# Altium PCB PCB-esp32.PcbDoc (part 2 of 2)
Units mil, origin at the board's own origin, x right, y up, seen from the top; angles counter-clockwise.
Board outline 2705 x 1000 mil, 4 copper layers (L1, L2, L3, L4), stack 61.583 mil thick; 64 components, 80 nets, 299 pads, 75 vias.
Unrouted connection lines stored in the file: 6.
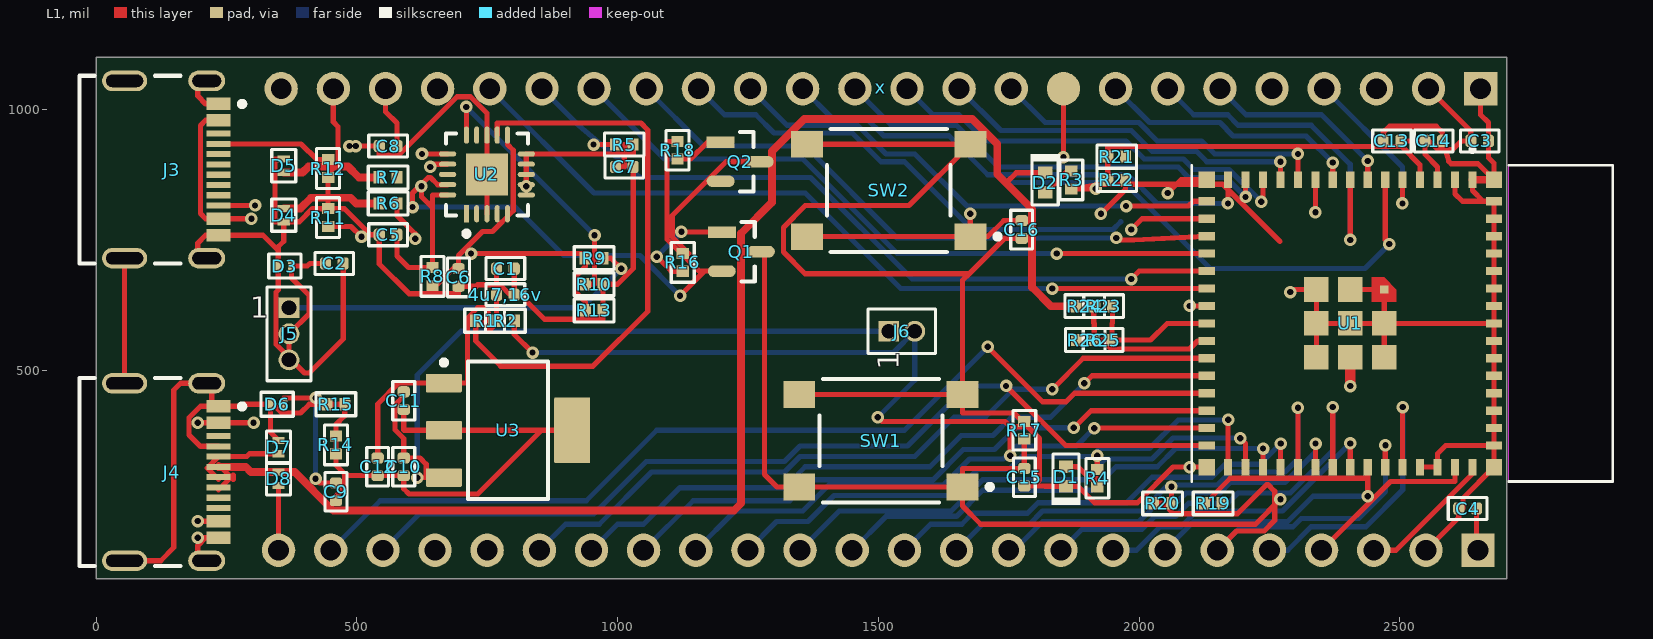
[diagram p0: L1 view]

## Part data (continued)
R6 R7 R21 R22: library part RC0402FR-0727RL, "RES 27 OHM 1% 1/16W 0402", Case Code (Imperial)=0402, Case Code (Metric)=1005, Manufacturer="Yageo Group", Max Operating Temperature=155°C, Max Power Dissipation=63mW, Min Operating Temperature=-55°C, Power Dissipation=62.5mW, Supplier Part Number=YAG3086CT-ND, Temperature Coefficient=100ppm/°C, Tolerance=1%, Voltage Rating=50V, Case/Package=0402, Category="Chip SMD Resistors", China RoHS=Non-Compliant, ComponentLink1Description=https://datasheet.octopart.com:443/RC0402FR-0727RL-Yageo-datasheet-175887523.pdf?src-supplier=Newark, ComponentLink1URL=https://datasheet.octopart.com:443/RC0402FR-0727RL-Yageo-datasheet-175887523.pdf?src-supplier=Newark, ComponentLink2Description=https://datasheet.octopart.com:443/RC0402FR-0727RL-Yageo-datasheet-8324527.pdf?src-supplier=Newark, ComponentLink2URL=https://datasheet.octopart.com:443/RC0402FR-0727RL-Yageo-datasheet-8324527.pdf?src-supplier=Newark, ComponentLink3Description=https://datasheet.octopart.com:443/RC0402FR-0727RL-Yageo-datasheet-103092701.pdf?src-supplier=Upverter, ComponentLink3URL=https://datasheet.octopart.com:443/RC0402FR-0727RL-Yageo-datasheet-103092701.pdf?src-supplier=Upverter, ComponentLink4Description=https://datasheet.octopart.com:443/RC0402FR-0727RL-Yageo-datasheet-10408619.pdf?src-supplier=element14+APAC, ComponentLink4URL=https://datasheet.octopart.com:443/RC0402FR-0727RL-Yageo-datasheet-10408619.pdf?src-supplier=element14+APAC, ComponentLink5Description=https://datasheet.octopart.com:443/RC0402FR-0727RL-Yageo-datasheet-62067350.pdf?src-supplier=element14+APAC, ComponentLink5URL=https://datasheet.octopart.com:443/RC0402FR-0727RL-Yageo-datasheet-62067350.pdf?src-supplier=element14+APAC, ComponentLink6Description=https://datasheet.octopart.com:443/RC0402FR-0727RL-Yageo-Group-datasheet-176638170.pdf?src-supplier=Future+Electronics, ComponentLink6URL=https://datasheet.octopart.com:443/RC0402FR-0727RL-Yageo-Group-datasheet-176638170.pdf?src-supplier=Future+Electronics, ComponentLink7Description=https://datasheet.octopart.com:443/RC0402FR-0727RL-Yageo-datasheet-164759695.pdf?src-supplier=Future+Electronics, ComponentLink7URL=https://datasheet.octopart.com:443/RC0402FR-0727RL-Yageo-datasheet-164759695.pdf?src-supplier=Future+Electronics, ComponentLink8Description=https://datasheet.octopart.com:443/RC0402FR-0727RL-Yageo-datasheet-137700087.pdf?src-supplier=Future+Electronics, ComponentLink8URL=https://datasheet.octopart.com:443/RC0402FR-0727RL-Yageo-datasheet-137700087.pdf?src-supplier=Future+Electronics, ComponentLink9Description=https://datasheet.octopart.com:443/RC0402FR-0727RL-Yageo-datasheet-12531192.pdf?src-supplier=Future+Electronics, ComponentLink9URL=https://datasheet.octopart.com:443/RC0402FR-0727RL-Yageo-datasheet-12531192.pdf?src-supplier=Future+Electronics, ComponentLink10Description=https://datasheet.octopart.com:443/RC0402FR-0727RL-Yageo-datasheet-175423674.pdf?src-supplier=SOS+electronic, ComponentLink10URL=https://datasheet.octopart.com:443/RC0402FR-0727RL-Yageo-datasheet-175423674.pdf?src-supplier=SOS+electronic, ComponentLink11Description=https://datasheet.octopart.com:443/RC0402FR-0727RL-Yageo-datasheet-8329306.pdf?src-supplier=SOS+electronic, ComponentLink11URL=https://datasheet.octopart.com:443/RC0402FR-0727RL-Yageo-datasheet-8329306.pdf?src-supplier=SOS+electronic, ComponentLink12Description=https://datasheet.octopart.com:443/RC0402FR-0727RL-Yageo-datasheet-148775077.pdf?src-supplier=TME, ComponentLink12URL=https://datasheet.octopart.com:443/RC0402FR-0727RL-Yageo-datasheet-148775077.pdf?src-supplier=TME, ComponentLink13Description=https://datasheet.octopart.com/RC0402FR-0727RL-Yageo-datasheet-73766026.pdf, ComponentLink13URL=https://datasheet.octopart.com/RC0402FR-0727RL-Yageo-datasheet-73766026.pdf, ComponentLink14Description=http://sigma.octopart.com:80/conflict_mineral_statement/Yageo-company-3.pdf?src-supplier=Compliance+Statements, ComponentLink14URL=http://sigma.octopart.com:80/conflict_mineral_statement/Yageo-company-3.pdf?src-supplier=Compliance+Statements, ComponentLink15Description=http://sigma.octopart.com:80/rohs_statement/Yageo-company-2.pdf?src-supplier=Compliance+Statements, ComponentLink15URL=http://sigma.octopart.com:80/rohs_statement/Yageo-company-2.pdf?src-supplier=Compliance+Statements, Composition="Thick Film", Depth=500µm, Export Control Classification Number (ECCN) Code=EAR99, Features="Moisture Resistant", Harmonized Tariff Schedule (HTS) Code=8533.21.00.30, Height=350µm, Introduction Date=2008-07-18, Lead Free="Lead Free", Length=1mm, Lifecycle Status=Production, Manufacturer Part Number=RC0402FR-0727RL, Military Standard=Not, Mounting Technology="Surface Mount", Number of Terminals=2, Number of Terminations=2, Pins=2, Power Rating=63mW, Pricing="1=0.1, 10=0.007, 25=0.0068, 50=0.0062, 100=0.0051, 250=0.00308 (USD)", REACH SVHC=Yes, RoHS=Compliant, Schedule B="8533210045, 8533210045|8533210045, 8533210045|8533210045|8533210045, 8533210045|8533210045|8533210045|8533210045", Stock=290063, Supplier=DigiKey, Termination=SMD/SMT, Voltage Rating (AC)=50V, Voltage Rating (DC)=50V, Weight=652.039032µg, Width=500µm, Working Voltage=50V
R9: library part AC0603JR-134K7L, "RES 4.7K OHM 1% 1/16W 0402", Case/Package=0603, Manufacturer="Yageo Group", Max Operating Temperature=155°C, Min Operating Temperature=-55°C, Power Dissipation=100mW, Temperature Coefficient=100ppm/°C, Tolerance=5%, Voltage Rating=75V, Category="Chip SMD Resistors", China RoHS=Non-Compliant, ComponentLink1Description=https://datasheet.octopart.com:443/AC0603JR-134K7L-Yageo-datasheet-182189377.pdf?src-supplier=IHS, ComponentLink1URL=https://datasheet.octopart.com:443/AC0603JR-134K7L-Yageo-datasheet-182189377.pdf?src-supplier=IHS, ComponentLink2Description=https://datasheet.octopart.com:443/AC0603JR-134K7L-Yageo-datasheet-86786639.pdf?src-supplier=Upverter, ComponentLink2URL=https://datasheet.octopart.com:443/AC0603JR-134K7L-Yageo-datasheet-86786639.pdf?src-supplier=Upverter, ComponentLink3Description=https://datasheet.octopart.com:443/AC0603JR-134K7L-Yageo-datasheet-178509465.pdf?src-supplier=Newark, ComponentLink3URL=https://datasheet.octopart.com:443/AC0603JR-134K7L-Yageo-datasheet-178509465.pdf?src-supplier=Newark, ComponentLink4Description=https://datasheet.octopart.com:443/AC0603JR-134K7L-Yageo-Group-datasheet-189830439.pdf?src-supplier=Future+Electronics, ComponentLink4URL=https://datasheet.octopart.com:443/AC0603JR-134K7L-Yageo-Group-datasheet-189830439.pdf?src-supplier=Future+Electronics, ComponentLink5Description=https://datasheet.octopart.com:443/AC0603JR-134K7L-Yageo-datasheet-166720450.pdf?src-supplier=JRH+Electronics, ComponentLink5URL=https://datasheet.octopart.com:443/AC0603JR-134K7L-Yageo-datasheet-166720450.pdf?src-supplier=JRH+Electronics, ComponentLink6Description=https://datasheet.octopart.com/AC0603JR-134K7L-Yageo-datasheet-12512238.pdf, ComponentLink6URL=https://datasheet.octopart.com/AC0603JR-134K7L-Yageo-datasheet-12512238.pdf, ComponentLink7Description=http://sigma.octopart.com:80/conflict_mineral_statement/Yageo-company-3.pdf?src-supplier=Compliance+Statements, ComponentLink7URL=http://sigma.octopart.com:80/conflict_mineral_statement/Yageo-company-3.pdf?src-supplier=Compliance+Statements, ComponentLink8Description=http://sigma.octopart.com:80/rohs_statement/Yageo-company-2.pdf?src-supplier=Compliance+Statements, ComponentLink8URL=http://sigma.octopart.com:80/rohs_statement/Yageo-company-2.pdf?src-supplier=Compliance+Statements, Composition="Thick Film", Country of Origin="Mainland China, Taiwan", Export Control Classification Number (ECCN) Code=EAR99, Harmonized Tariff Schedule (HTS) Code=8533.21.00.30, Height=450µm, Introduction Date=2012-04-10, Lifecycle Status=Production, Manufacturer Part Number=AC0603JR-134K7L, Mounting Technology="Surface Mount", Number of Terminals=2, Packaging="Tape & Reel", Power Rating=100mW, Pricing="20000=0.0022 (USD)", REACH SVHC=Yes, RoHS=Compliant, Stock=740000, Supplier="Arrow Electronics", Supplier Part Number=AC0603JR-134K7L, Width=800µm, Working Voltage=75V
R10 R13 R16 R17 R18: library part AC0402FR-0710KL, "RES SMD 10K OHM 1% 1/16W 0402", Case Code (Imperial)=0402, Case Code (Metric)=1005, Manufacturer="Yageo Group", Max Operating Temperature=155°C, Max Power Dissipation=63mW, Min Operating Temperature=-55°C, Power Dissipation=62.5mW, Supplier Part Number=YAG3436DKR-ND, Temperature Coefficient=100ppm/°C, Tolerance=1%, Voltage Rating=50V, Case/Package=0402, Category="Chip SMD Resistors", China RoHS=Non-Compliant, ComponentLink1Description=https://datasheet.octopart.com:443/AC0402FR-0710KL-Yageo-datasheet-182189377.pdf?src-supplier=IHS, ComponentLink1URL=https://datasheet.octopart.com:443/AC0402FR-0710KL-Yageo-datasheet-182189377.pdf?src-supplier=IHS, ComponentLink2Description=https://datasheet.octopart.com:443/AC0402FR-0710KL-Yageo-datasheet-83209224.pdf?src-supplier=Upverter, ComponentLink2URL=https://datasheet.octopart.com:443/AC0402FR-0710KL-Yageo-datasheet-83209224.pdf?src-supplier=Upverter, ComponentLink3Description=https://datasheet.octopart.com:443/AC0402FR-0710KL-Yageo-datasheet-178509465.pdf?src-supplier=Newark, ComponentLink3URL=https://datasheet.octopart.com:443/AC0402FR-0710KL-Yageo-datasheet-178509465.pdf?src-supplier=Newark, ComponentLink4Description=https://datasheet.octopart.com:443/AC0402FR-0710KL-Yageo-datasheet-166720450.pdf?src-supplier=JRH+Electronics, ComponentLink4URL=https://datasheet.octopart.com:443/AC0402FR-0710KL-Yageo-datasheet-166720450.pdf?src-supplier=JRH+Electronics, ComponentLink5Description=https://datasheet.octopart.com:443/AC0402FR-0710KL-Yageo-datasheet-151884373.pdf?src-supplier=Future+Electronics, ComponentLink5URL=https://datasheet.octopart.com:443/AC0402FR-0710KL-Yageo-datasheet-151884373.pdf?src-supplier=Future+Electronics, ComponentLink6Description=https://datasheet.octopart.com:443/AC0402FR-0710KL-Yageo-Group-datasheet-189830439.pdf?src-supplier=Future+Electronics, ComponentLink6URL=https://datasheet.octopart.com:443/AC0402FR-0710KL-Yageo-Group-datasheet-189830439.pdf?src-supplier=Future+Electronics, ComponentLink7Description=https://datasheet.octopart.com:443/AC0402FR-0710KL-Yageo-datasheet-137699919.pdf?src-supplier=Future+Electronics, ComponentLink7URL=https://datasheet.octopart.com:443/AC0402FR-0710KL-Yageo-datasheet-137699919.pdf?src-supplier=Future+Electronics, ComponentLink8Description=https://datasheet.octopart.com:443/AC0402FR-0710KL-Yageo-datasheet-24580492.pdf?src-supplier=Future+Electronics, ComponentLink8URL=https://datasheet.octopart.com:443/AC0402FR-0710KL-Yageo-datasheet-24580492.pdf?src-supplier=Future+Electronics, ComponentLink9Description=https://datasheet.octopart.com:443/AC0402FR-0710KL-Yageo-datasheet-13029202.pdf?src-supplier=Future+Electronics, ComponentLink9URL=https://datasheet.octopart.com:443/AC0402FR-0710KL-Yageo-datasheet-13029202.pdf?src-supplier=Future+Electronics, ComponentLink10Description=https://datasheet.octopart.com/AC0402FR-0710KL-Yageo-datasheet-12512238.pdf, ComponentLink10URL=https://datasheet.octopart.com/AC0402FR-0710KL-Yageo-datasheet-12512238.pdf, ComponentLink11Description=https://datasheet.octopart.com:443/AC0402FR-0710KL-Yageo-Group-datasheet-164768995.pdf?src-supplier=ODG+(Origin+Data+Global), ComponentLink11URL=https://datasheet.octopart.com:443/AC0402FR-0710KL-Yageo-Group-datasheet-164768995.pdf?src-supplier=ODG+(Origin+Data+Global), ComponentLink12Description=https://datasheet.octopart.com:443/AC0402FR-0710KL-Yageo-datasheet-128677448.pdf?src-supplier=X-ON, ComponentLink12URL=https://datasheet.octopart.com:443/AC0402FR-0710KL-Yageo-datasheet-128677448.pdf?src-supplier=X-ON, ComponentLink13Description=http://sigma.octopart.com:80/conflict_mineral_statement/Yageo-company-3.pdf?src-supplier=Compliance+Statements, ComponentLink13URL=http://sigma.octopart.com:80/conflict_mineral_statement/Yageo-company-3.pdf?src-supplier=Compliance+Statements, ComponentLink14Description=http://sigma.octopart.com:80/rohs_statement/Yageo-company-2.pdf?src-supplier=Compliance+Statements, ComponentLink14URL=http://sigma.octopart.com:80/rohs_statement/Yageo-company-2.pdf?src-supplier=Compliance+Statements, Composition="Thick Film", Depth=500µm, Export Control Classification Number (ECCN) Code=EAR99, Features="Automotive AEC-Q200, Moisture Resistant", Harmonized Tariff Schedule (HTS) Code=8533.21.00.30, Height=320µm, Introduction Date=2012-04-10, Lead Free="Lead Free", Length=990.6µm, Lifecycle Status=Production, Manufacturer Part Number=AC0402FR-0710KL, Military Standard=Not, Mounting Technology="Surface Mount", Number of Terminals=2, Number of Terminations=2, Packaging="Tape & Reel", Power Rating=62.5mW, Pricing="1=0.1, 10=0.008, 25=0.0076, 50=0.0072, 100=0.0066, 250=0.00576, 500=0.00406 (USD)", REACH SVHC=Yes, RoHS=Compliant, Schedule B="8533210045, 8533210045|8533210045|8533210045|8533210045|8533210045|8533210045|8533210045|8533210045|8533210045|8533210045|8533210045|8533210045|8533210045|8533210045|8533210045|8533210045|8533210045|8533210045|8533210045, 8533210045|8533210045|8533210045|8533210045|8533210045|8533210045|8533210045|8533210045|8533210045|8533210045|8533210045|8533210045|8533210045|8533210045|8533210045|8533210045|8533210045|8533210045|8533210045|8533210045|8533210045|8533210045|8533210045|85", Stock=2854599, Supplier=DigiKey, Termination=SMD/SMT, Width=500µm, Working Voltage=50V
R11 R12 R14 R15: library part AC0402FR-075K1L, "RES SMD 5.1K OHM 1% 1/16W 0402", Case Code (Imperial)=0402, Case Code (Metric)=1005, Manufacturer="Yageo Group", Max Operating Temperature=155°C, Max Power Dissipation=63mW, Min Operating Temperature=-55°C, Power Dissipation=62.5mW, Temperature Coefficient=100ppm/°C, Tolerance=1%, Voltage Rating=50V, Case/Package=0402, Category="Chip SMD Resistors", China RoHS=Non-Compliant, ComponentLink1Description=https://datasheet.octopart.com:443/AC0402FR-075K1L-Yageo-datasheet-182189377.pdf?src-supplier=IHS, ComponentLink1URL=https://datasheet.octopart.com:443/AC0402FR-075K1L-Yageo-datasheet-182189377.pdf?src-supplier=IHS, ComponentLink2Description=https://datasheet.octopart.com:443/AC0402FR-075K1L-Yageo-datasheet-83209224.pdf?src-supplier=Upverter, ComponentLink2URL=https://datasheet.octopart.com:443/AC0402FR-075K1L-Yageo-datasheet-83209224.pdf?src-supplier=Upverter, ComponentLink3Description=https://datasheet.octopart.com:443/AC0402FR-075K1L-Yageo-datasheet-178509465.pdf?src-supplier=Newark, ComponentLink3URL=https://datasheet.octopart.com:443/AC0402FR-075K1L-Yageo-datasheet-178509465.pdf?src-supplier=Newark, ComponentLink4Description=https://datasheet.octopart.com/AC0402FR-075K1L-Yageo-datasheet-12512238.pdf, ComponentLink4URL=https://datasheet.octopart.com/AC0402FR-075K1L-Yageo-datasheet-12512238.pdf, ComponentLink5Description=https://datasheet.octopart.com:443/AC0402FR-075K1L-Yageo-Group-datasheet-189830439.pdf?src-supplier=Future+Electronics, ComponentLink5URL=https://datasheet.octopart.com:443/AC0402FR-075K1L-Yageo-Group-datasheet-189830439.pdf?src-supplier=Future+Electronics, ComponentLink6Description=https://datasheet.octopart.com:443/AC0402FR-075K1L-Yageo-datasheet-166720450.pdf?src-supplier=Future+Electronics, ComponentLink6URL=https://datasheet.octopart.com:443/AC0402FR-075K1L-Yageo-datasheet-166720450.pdf?src-supplier=Future+Electronics, ComponentLink7Description=https://datasheet.octopart.com:443/AC0402FR-075K1L-Yageo-datasheet-151884373.pdf?src-supplier=Future+Electronics, ComponentLink7URL=https://datasheet.octopart.com:443/AC0402FR-075K1L-Yageo-datasheet-151884373.pdf?src-supplier=Future+Electronics, ComponentLink8Description=https://datasheet.octopart.com:443/AC0402FR-075K1L-Yageo-datasheet-137699919.pdf?src-supplier=Future+Electronics, ComponentLink8URL=https://datasheet.octopart.com:443/AC0402FR-075K1L-Yageo-datasheet-137699919.pdf?src-supplier=Future+Electronics, ComponentLink9Description=https://datasheet.octopart.com:443/AC0402FR-075K1L-Yageo-datasheet-24580492.pdf?src-supplier=Future+Electronics, ComponentLink9URL=https://datasheet.octopart.com:443/AC0402FR-075K1L-Yageo-datasheet-24580492.pdf?src-supplier=Future+Electronics, ComponentLink10Description=https://datasheet.octopart.com:443/AC0402FR-075K1L-Yageo-datasheet-13029202.pdf?src-supplier=Future+Electronics, ComponentLink10URL=https://datasheet.octopart.com:443/AC0402FR-075K1L-Yageo-datasheet-13029202.pdf?src-supplier=Future+Electronics, ComponentLink11Description=https://datasheet.octopart.com:443/AC0402FR-075K1L-Yageo-Group-datasheet-164768995.pdf?src-supplier=ODG+(Origin+Data+Global), ComponentLink11URL=https://datasheet.octopart.com:443/AC0402FR-075K1L-Yageo-Group-datasheet-164768995.pdf?src-supplier=ODG+(Origin+Data+Global), ComponentLink12Description=http://sigma.octopart.com:80/conflict_mineral_statement/Yageo-company-3.pdf?src-supplier=Compliance+Statements, ComponentLink12URL=http://sigma.octopart.com:80/conflict_mineral_statement/Yageo-company-3.pdf?src-supplier=Compliance+Statements, ComponentLink13Description=http://sigma.octopart.com:80/rohs_statement/Yageo-company-2.pdf?src-supplier=Compliance+Statements, ComponentLink13URL=http://sigma.octopart.com:80/rohs_statement/Yageo-company-2.pdf?src-supplier=Compliance+Statements, Composition="Thick Film", Country of Origin="Mainland China, Taiwan", Depth=500µm, Export Control Classification Number (ECCN) Code=EAR99, Features="Automotive AEC-Q200, Moisture Resistant", Harmonized Tariff Schedule (HTS) Code=8533.21.00.30, Height=320µm, Introduction Date=2012-04-10, Lead Free="Lead Free", Length=990.6µm, Lifecycle Status=Production, Manufacturer Part Number=AC0402FR-075K1L, Military Standard=Not, Mounting Technology="Surface Mount", Number of Terminals=2, Number of Terminations=2, Power Rating=62.5mW, Pricing="10000=0.001 (USD)", REACH SVHC=Yes, RoHS=Compliant, Schedule B="8533210045, 8533210045|8533210045|8533210045|8533210045|8533210045|8533210045|8533210045|8533210045|8533210045|8533210045|8533210045|8533210045|8533210045|8533210045|8533210045|8533210045|8533210045|8533210045|8533210045|8533210045|8533210045|8533210045|8533210045|85", Stock=10000, Supplier=Avnet, Supplier Part Number=AC0402FR-075K1L, Width=500µm, Working Voltage=50V
SW1 SW2: "SWITCH TACTILE SPST-NO 0.05A 12V", Case/Package=SMD/SMT, Color=Black, Contact Current Rating=50mA, Contact Resistance=100mΩ, Insulation Resistance=100GΩ, Manufacturer="C&K Components", Max Operating Temperature=60°C, Max Voltage Rating (DC)=12V, Min Operating Temperature=-20°C, Operating Force=1.57N, Supplier Part Number=CKN9112DKR-ND, Actuator Length=850µm, Actuator Material="Nylon, Polyamide", Category="Tactile Switches", ComponentLink1Description=https://datasheet.octopart.com:443/PTS645SM43SMTR92LFS-C%26K-Components-datasheet-169841344.pdf?src-supplier=Newark, ComponentLink1URL=https://datasheet.octopart.com:443/PTS645SM43SMTR92LFS-C%26K-Components-datasheet-169841344.pdf?src-supplier=Newark, ComponentLink2Description=https://datasheet.octopart.com:443/PTS645SM43SMTR92LFS-C%26K-Components-datasheet-41191814.pdf?src-supplier=Newark, ComponentLink2URL=https://datasheet.octopart.com:443/PTS645SM43SMTR92LFS-C%26K-Components-datasheet-41191814.pdf?src-supplier=Newark, ComponentLink3Description=https://datasheet.octopart.com:443/PTS645SM43SMTR92LFS-C%26K-Components-datasheet-67873720.pdf?src-supplier=Upverter, ComponentLink3URL=https://datasheet.octopart.com:443/PTS645SM43SMTR92LFS-C%26K-Components-datasheet-67873720.pdf?src-supplier=Upverter, ComponentLink4Description=https://datasheet.octopart.com:443/PTS645SM43SMTR92-LFS-C%26K-Components-datasheet-39117004.pdf?src-supplier=Upverter, ComponentLink4URL=https://datasheet.octopart.com:443/PTS645SM43SMTR92-LFS-C%26K-Components-datasheet-39117004.pdf?src-supplier=Upverter, ComponentLink5Description=https://datasheet.octopart.com:443/PTS645SM43SMTR92LFS-C%26K-Components-datasheet-165782998.pdf?src-supplier=Farnell, ComponentLink5URL=https://datasheet.octopart.com:443/PTS645SM43SMTR92LFS-C%26K-Components-datasheet-165782998.pdf?src-supplier=Farnell, ComponentLink6Description=https://datasheet.octopart.com:443/PTS645SM43SMTR92LFS-C%26K-Components-datasheet-110647872.pdf?src-supplier=TME, ComponentLink6URL=https://datasheet.octopart.com:443/PTS645SM43SMTR92LFS-C%26K-Components-datasheet-110647872.pdf?src-supplier=TME, ComponentLink7Description=https://datasheet.octopart.com:443/PTS645SM43SMTR92LFS-C%26K-Components-datasheet-24578962.pdf?src-supplier=Future+Electronics, ComponentLink7URL=https://datasheet.octopart.com:443/PTS645SM43SMTR92LFS-C%26K-Components-datasheet-24578962.pdf?src-supplier=Future+Electronics, ComponentLink8Description=https://datasheet.octopart.com:443/PTS645SM43SMTR92LFS-C%26K-Components-datasheet-138128951.pdf?src-supplier=Future+Electronics, ComponentLink8URL=https://datasheet.octopart.com:443/PTS645SM43SMTR92LFS-C%26K-Components-datasheet-138128951.pdf?src-supplier=Future+Electronics, ComponentLink9Description=https://datasheet.octopart.com:443/PTS645SM43SMTR92LFS-C%26K-Components-datasheet-62111174.pdf?src-supplier=Future+Electronics, ComponentLink9URL=https://datasheet.octopart.com:443/PTS645SM43SMTR92LFS-C%26K-Components-datasheet-62111174.pdf?src-supplier=Future+Electronics, ComponentLink10Description=https://datasheet.octopart.com:443/PTS645SM43SMTR92-LFS-C%26K-Components-datasheet-5331042.pdf?src-supplier=Future+Electronics, ComponentLink10URL=https://datasheet.octopart.com:443/PTS645SM43SMTR92-LFS-C%26K-Components-datasheet-5331042.pdf?src-supplier=Future+Electronics, ComponentLink11Description=https://datasheet.octopart.com:443/PTS645SM43SMTR92LFS-C%26K-Components-datasheet-62111384.pdf?src-supplier=Electro+Sonic, ComponentLink11URL=https://datasheet.octopart.com:443/PTS645SM43SMTR92LFS-C%26K-Components-datasheet-62111384.pdf?src-supplier=Electro+Sonic, ComponentLink12Description=https://datasheet.octopart.com:443/PTS645SM43SMTR92-LFS-C%26K-Components-datasheet-23707823.pdf?src-supplier=Electro+Sonic, ComponentLink12URL=https://datasheet.octopart.com:443/PTS645SM43SMTR92-LFS-C%26K-Components-datasheet-23707823.pdf?src-supplier=Electro+Sonic, ComponentLink13Description=https://datasheet.octopart.com:443/PTS645SM43SMTR92LFS-C%26K-Components-datasheet-44395798.pdf?src-supplier=Electro+Sonic, ComponentLink13URL=https://datasheet.octopart.com:443/PTS645SM43SMTR92LFS-C%26K-Components-datasheet-44395798.pdf?src-supplier=Electro+Sonic, ComponentLink14Description=http://sigma.octopart.com:80/reach_statement/ITT-company-18.pdf?src-supplier=Compliance+Statements, ComponentLink14URL=http://sigma.octopart.com:80/reach_statement/ITT-company-18.pdf?src-supplier=Compliance+Statements, Contact Material=Silver, Contact Plating=Silver, Current Rating=50mA, Depth=9mm, Electrical Life=100kcycles, Height=3.45mm, Illumination Type="Illuminated, Non-Illuminated", Lead Free="Lead Free", Length=6mm, Life (Cycles)=100kcycles, Lifecycle Status=Production, Manufacturer Package Identifier=PTS645SM43SMTR92LFS, Manufacturer Part Number=PTS645SM43SMTR92LFS, Max Current Rating=50mA, Mechanical Life=100kcycles, Mounting Technology="Surface Mount", Number of Positions=1, Orientation=Straight, Packaging="Cut Tape (CT)", Pricing="1=0.32, 10=0.275, 25=0.2576, 100=0.2307, 250=0.2138, 500=0.20176 (USD)", REACH SVHC=Yes, RoHS=Compliant, Stock=36198, Supplier=DigiKey, Switch Function=Off-Mom, Termination="Gull Wing", Throw Configuration=SPST, Voltage Rating (DC)=12V
U1: "SMD module, ESP32-S3FN8, 8 MB SPI flash, PCB antenna", Manufacturer="Espressif Systems", Supplier Part Number=5407-ESP32-S3-MINI-1-N8CT-ND, Category="RF Transceiver Modules and Modems", ComponentLink1Description=https://datasheet.octopart.com:443/ESP32-S3-MINI-1-N8-Espressif-Systems-datasheet-188867343.pdf?src-supplier=TME, ComponentLink1URL=https://datasheet.octopart.com:443/ESP32-S3-MINI-1-N8-Espressif-Systems-datasheet-188867343.pdf?src-supplier=TME, ComponentLink2Description=https://datasheet.octopart.com:443/ESP32-S3-MINI-1-N8-Espressif-Systems-datasheet-165560562.pdf?src-supplier=TME, ComponentLink2URL=https://datasheet.octopart.com:443/ESP32-S3-MINI-1-N8-Espressif-Systems-datasheet-165560562.pdf?src-supplier=TME, ComponentLink3Description=https://datasheet.octopart.com:443/ESP32-S3-MINI-1-N8-Espressif-Systems-datasheet-165560559.pdf?src-supplier=TME, ComponentLink3URL=https://datasheet.octopart.com:443/ESP32-S3-MINI-1-N8-Espressif-Systems-datasheet-165560559.pdf?src-supplier=TME, ComponentLink4Description=https://datasheet.octopart.com:443/ESP32-S3-MINI-1-N8-Espressif-Systems-datasheet-192318068.pdf?src-supplier=HQonline, ComponentLink4URL=https://datasheet.octopart.com:443/ESP32-S3-MINI-1-N8-Espressif-Systems-datasheet-192318068.pdf?src-supplier=HQonline, Manufacturer Part Number=ESP32-S3-MINI-1-N8, Pricing="1=5.28, 10=4.566, 25=4.3196, 100=3.9802, 250=3.7768, 650=3.58103, 1300=3.44874, 1950=3.37497 (USD)", RoHS=Compliant, Stock=6966, Supplier=DigiKey
U2: "IC USB SERIAL FULL UART 20QFN", Ambient Temperature Range High=85°C, Case/Package=QFN, Clock Frequency=12.02MHz, Manufacturer=FTDI, Max Supply Current=8.4mA, Max Supply Voltage=5.5V, Min Operating Temperature=-40°C, Min Supply Voltage=2.97V, Operating Supply Current=8mA, Operating Supply Voltage=5V, Supplier Part Number=768-1128-6-ND, Category="Interface ICs", ComponentLink1Description=https://datasheet.octopart.com:443/FT231XQ-R-FTDI-datasheet-182343132.pdf?src-supplier=IHS, ComponentLink1URL=https://datasheet.octopart.com:443/FT231XQ-R-FTDI-datasheet-182343132.pdf?src-supplier=IHS, ComponentLink2Description=https://datasheet.octopart.com:443/FT231XQ-R-FTDI-datasheet-11021087.pdf?src-supplier=HQonline, ComponentLink2URL=https://datasheet.octopart.com:443/FT231XQ-R-FTDI-datasheet-11021087.pdf?src-supplier=HQonline, ComponentLink3Description=https://datasheet.octopart.com:443/FT231XQ-R-FTDI-datasheet-28834672.pdf?src-supplier=SOS+electronic, ComponentLink3URL=https://datasheet.octopart.com:443/FT231XQ-R-FTDI-datasheet-28834672.pdf?src-supplier=SOS+electronic, ComponentLink4Description=https://datasheet.octopart.com:443/FT231XQ-R-FTDI-datasheet-68321328.pdf?src-supplier=TME, ComponentLink4URL=https://datasheet.octopart.com:443/FT231XQ-R-FTDI-datasheet-68321328.pdf?src-supplier=TME, ComponentLink5Description=https://datasheet.octopart.com:443/FT231XQ-R-FTDI-datasheet-134530624.pdf?src-supplier=SHENGYU+ELECTRONICS, ComponentLink5URL=https://datasheet.octopart.com:443/FT231XQ-R-FTDI-datasheet-134530624.pdf?src-supplier=SHENGYU+ELECTRONICS, Data Rate=12Mbps, Height=800µm, Height - Seated (Max)=800µm, Interface="UART, USB", Lead Free="Lead Free", Length=4mm, Lifecycle Status=Production, Manufacturer Part Number=FT231XQ-R, Max Operating Temperature=85°C, Mounting Technology="Surface Mount", Number of Channels=1, Number of Terminals=20, Pins=20, Pricing="1=2.34, 25=2.27, 100=2.2, 250=2, 500=1.82002, 1000=1.7625 (USD)", REACH SVHC=Yes, RoHS=Compliant, Supplier=DigiKey, Terminal Pitch=500µm, Weight=123.008581mg, Width=4mm
U3: "IC REG LIN 3.3V 1.5A SOT-223-4", Case/Package=SOT-223, Dropout Voltage=340mV, Input Bias Current=1mA, Manufacturer="Texas Instruments", Manufacturer Lifecycle Status=ACTIVE, Max Operating Temperature=125°C, Max Output current=1.5A, Max Output Voltage=3.3V, Max Supply Voltage=20V, Min Current Limit=1.6A, Min Input Voltage=2.1V, Min Operating Temperature=-40°C, Supplier Part Number=296-24897-1-ND, Accuracy=3%, Category="LDO Voltage Regulators", ComponentLink1Description=https://datasheet.octopart.com:443/TL1963A-33DCYR-Texas-Instruments-datasheet-36835243.pdf?src-supplier=Texas+Instruments, ComponentLink1URL=https://datasheet.octopart.com:443/TL1963A-33DCYR-Texas-Instruments-datasheet-36835243.pdf?src-supplier=Texas+Instruments, ComponentLink2Description=https://octopart.com:443/opatz8j6/c1?t=EjmpjMBXl0vImSHjhLhwODnGOOOlmhnv--i_Sxh8rB3fi-jSjN98Np_RNoEIV3-nN6Y4OTd0L6Kh78aC6uyqrA22v3gafxA41Uc37vCd4h8kxm7GholU4FQ6oeXPE741CpYC4NAVup1CoDK6Ydf1zzmq_5MZWs_6fzaLpKKjVRX4vCs5hme4JQh8gN1fX5I0NLtva4dPGJ030xXj4iNJRmebbxkApTO2H38Ysq51JDIaVjhVlfiHZc4WHeD9m0_LXgIdIrRiup47vow1lY03gh0J4G3CC09RGMWzPWscmsAndMlhzYYxjZHlC1HXN4ni31z_9a7_VnpOlO8vxntYW-HMbPOTYAWjnPGnbKoQXn0aBAR-NFErIYlEVFO7RxcEpk6vrME&src-supplier=Texas+Instruments, ComponentLink2URL=https://octopart.com:443/opatz8j6/c1?t=EjmpjMBXl0vImSHjhLhwODnGOOOlmhnv--i_Sxh8rB3fi-jSjN98Np_RNoEIV3-nN6Y4OTd0L6Kh78aC6uyqrA22v3gafxA41Uc37vCd4h8kxm7GholU4FQ6oeXPE741CpYC4NAVup1CoDK6Ydf1zzmq_5MZWs_6fzaLpKKjVRX4vCs5hme4JQh8gN1fX5I0NLtva4dPGJ030xXj4iNJRmebbxkApTO2H38Ysq51JDIaVjhVlfiHZc4WHeD9m0_LXgIdIrRiup47vow1lY03gh0J4G3CC09RGMWzPWscmsAndMlhzYYxjZHlC1HXN4ni31z_9a7_VnpOlO8vxntYW-HMbPOTYAWjnPGnbKoQXn0aBAR-NFErIYlEVFO7RxcEpk6vrME&src-supplier=Texas+Instruments, ComponentLink3Description=https://datasheet.octopart.com:443/TL1963A-33DCYR-Texas-Instruments-datasheet-10255270.pdf?src-supplier=Texas+Instruments, ComponentLink3URL=https://datasheet.octopart.com:443/TL1963A-33DCYR-Texas-Instruments-datasheet-10255270.pdf?src-supplier=Texas+Instruments, ComponentLink4Description=https://sigma.octopart.com:443/49253063/technical_drawing/Texas-Instruments-TL1963A-33DCYR.pdf?src-supplier=Texas+Instruments, ComponentLink4URL=https://sigma.octopart.com:443/49253063/technical_drawing/Texas-Instruments-TL1963A-33DCYR.pdf?src-supplier=Texas+Instruments, ComponentLink5Description=https://datasheet.octopart.com:443/TL1963A-33DCYR-Texas-Instruments-datasheet-159117591.pdf?src-supplier=Augswan, ComponentLink5URL=https://datasheet.octopart.com:443/TL1963A-33DCYR-Texas-Instruments-datasheet-159117591.pdf?src-supplier=Augswan, ComponentLink6Description=https://datasheet.octopart.com:443/TL1963A-33DCYR-Texas-Instruments-datasheet-21820479.pdf?src-supplier=Newark, ComponentLink6URL=https://datasheet.octopart.com:443/TL1963A-33DCYR-Texas-Instruments-datasheet-21820479.pdf?src-supplier=Newark, ComponentLink7Description=https://datasheet.octopart.com:443/TL1963A-33DCYR-Texas-Instruments-datasheet-16079880.pdf?src-supplier=Farnell, ComponentLink7URL=https://datasheet.octopart.com:443/TL1963A-33DCYR-Texas-Instruments-datasheet-16079880.pdf?src-supplier=Farnell, ComponentLink8Description=https://datasheet.octopart.com:443/TL1963A-33DCYR-Texas-Instruments-datasheet-14171511.pdf?src-supplier=iiiC, ComponentLink8URL=https://datasheet.octopart.com:443/TL1963A-33DCYR-Texas-Instruments-datasheet-14171511.pdf?src-supplier=iiiC, ComponentLink9Description=http://sigma.octopart.com:80/reach_statement/Texas-Instruments-company-64.pdf?src-supplier=Compliance+Statements, ComponentLink9URL=http://sigma.octopart.com:80/reach_statement/Texas-Instruments-company-64.pdf?src-supplier=Compliance+Statements, ComponentLink10Description=http://sigma.octopart.com:80/conflict_mineral_statement/Texas-Instruments-company-63.pdf?src-supplier=Compliance+Statements, ComponentLink10URL=http://sigma.octopart.com:80/conflict_mineral_statement/Texas-Instruments-company-63.pdf?src-supplier=Compliance+Statements, Contact Plating=Tin, Height=1.8mm, Lead Free="Lead Free", Length=6.5mm, Lifecycle Status=Production, Manufacturer Part Number=TL1963A-33DCYR, Min Output Voltage=3.3V, Nominal Output Voltage=3.3V, Number of Outputs=1, Number of Regulators=1, Output Current=1.5A, Output Type=Fixed, Output Voltage=3.3V, Pins=4, Polarity=Positive, Pricing="1=3.13, 10=2.344, 25=2.1476, 100=1.9323, 250=1.82956, 500=1.76766, 1000=1.71669 (USD)", Quiescent Current=1mA, Radiation Hardening=No, REACH SVHC=No, RoHS=Compliant, Schedule B="8542390000, 8542390000|8542390000|8542390000|8542390000|8542390000", Stock=4134, Supplier=DigiKey, Thickness=1.6mm, Width=3.5mm

## Via types
v1: diameter 24, hole 12, L1 to L4, 75 vias

## Nets (pads, with @x,y where several pads share a name; then routed paths per layer and width w, separated by ;. In a path a pad name is that pad's centre, name@x,y a point inside that pad or via, vN(x,y) a via of type N, cw(c..) or ccw(c..) an arc to the next point about the centre after c; other vN are vias at no path point)
+3V3: C3.2 C4.2 C13.2 C14.2 J2.1 J6.2 R2.2 R3.2 R4.2 R5.2 R17.2 U1.3 x.2 | length 5792.3
  L1 w10: R2.2 802.01,568.99 v1(837,534) ; v1(954,933) R5.2 ; v1(1499,410) 1506.99,402.01 1743.19,402.01 1753.19,392.01 1765.2,392.01 ; v1(1753.19,336) 1753.19,380 1765.2,392.01 ; R17.2 1773.19,402.01 1773.19,392.01 1765.2,392.01 ; v1(1916.99,847.99) R3.2 1915.81,855.36 1926,857 2160,857 2270,747 ; R4.2 v1(1920,336) ; C13.2 C14.2 ; x.2 2636.14,958.86 C3.2 2618,940 2601,923 2573,923 2556,940 C14.2 ; U1.3 2572.36,890 2548.07,914.29 C14.2 ; C4.2 2646.93,158.07 J2.1
  L2 w10: v1(954,933) 1212,933 J6.2 2205,575 2270,640 2270,747 ; v1(1753.19,336) v1(1920,336) ; v1(1916.99,847.99) 1926,857 2160,857 2270,747 ; x.2 2555,759 ; J2.1 2555,250 2555,759 ; 2270,747 2297,720 2516,720 2555,759
  L4 w10: v1(837,534) 1529,534 J6.2 1570,481 v1(1499,410)
+3V3_FTDI: C5.2 C7.2 R5.1 R8.2 U2.10 U2.20 | length 899.2
  L1 w10: C5.2 576.93,719 598.92,697.01 R8.2 645,812 ; v1(624,853) 624,833 645,812 ; U2.20 645,836.26 645,812 ; v1(825,853) U2.10 1013,915 ; C7.2 1013,890 1013,915 ; 1013,915 1030.01,915 R5.1 1013,933 1013,915
  L2 w10: v1(624,853) v1(825,853)
+3V3_REG: C10.2 C11.2 J6.1 U3.3 | length 1401.5
  L1 w10: C11.2 590,451 573,434 573,386 590,369 C10.2 621.07,331.93 633,320 U3.3@633,294.45 ; v1(616,294) 616.45,294.45 U3.3@633,294.45 ; U3.3 U3.3@633,294.45
  L4 w10: v1(616,294) 616,491 700,575 J6.1
+5V: C12.2 R1.2 U3.1 | length 494.1
  L1 w10: C12.2 540,435.55 580,475.55 U3.1 712,475.55 712,600 732,620 742.36,620 752.36,610 752.36,595 R1.2
+5V5: C8.2 x.22 | length 119.1
  L1 w10: x.22 555,995.93 576.93,974 C8.2
+5V_VBUS1: C9.2 D6.2 J4.A4B9 J4.B4A9 | length 769.4
  L1 w10: v1(195,211) 195.49,210.51 J4.B4A9 ; v1(195,399.49) J4.A4B9 v1(302,399.49) ; D6.2 360,447 v1(421,447) ; v1(421,292) 429.14,283.86 C9.2
  L2 w10: v1(195,211) v1(195,399.49) ; v1(302,399.49) 409.49,292 v1(421,292)
  L4 w10: v1(421,292) v1(421,447)
+5V_VUSB1: J5.1 R9.2 | length 711.3
  L1 w10: R9.2 987,715 v1(1007,695)
  L4 w10: J5.1 932,620 v1(1007,695)
+5V_VUSB2: C2.2 D3.2 J3.A4B9 J3.B4A9 J5.2 J5.3 | length 837.7
  L1 w10: J3.A4B9 210,979.49 200,969.49 200,800.51 210,790.51 J3.B4A9 v1(298,790.51) ; J5.3 J5.2 409,609 409,643 375,677 D3.2 405,700 410,705 C2.2
  L2 w10: v1(298,790.51) 298,642 J5.2
"+_VCC FTDI": 4u7,16v.2 C1.2 R1.1 R2.1 U2.12 | length 1262
  L1 w10: C1.2 768.07,645 768.07,619.08 767.99,619 R2.1 773,595 756,578 754,578 737,595 R1.1 727.99,556.01 776,508 953,508 1058,613 1058,961 1044.73,974.27 769.27,974.27 U2.12
BTN_GPIO0: C16.2 R22.1 SW2.1 SW2.2 | length 802.7
  L1 w10: SW2.2 SW2.1 ; v1(1676.5,800) SW2.1 ; C16.2 1740.51,786.93 1710,756.42 SW2.1 ; v1(1927,800) 1974.02,847.02 R22.1
  L2 w10: v1(1676.5,800) v1(1927,800)
BTN_GPIOO: Q2.2
CAN1_USB_N: D4.2 J3.A7 J3.B7 R6.1 | length 196
  L1 w15: D4.2 392,810.59 412.41,831 488,831 499,820 R6.1
CAN1_USB_P: D5.2 J3.A6 J3.B6 R7.1 | length 196.5
  L1 w15: D5.2 396,879.41 407.59,891 483,891 504,870 R7.1
CHIP_PU: C15.2 J2.3 Q1.3 R17.1 SW1.1 SW1.2 U1.45 | length 2196.8
  L1 w10: Q1.3 1282,727.6 1282,300 1305.58,276.42 SW1.2 SW1.1 ; R17.1 C15.2 1661.5,311.93 SW1.1 ; v1(2271,253) 2223,205 1696.5,205 1661.5,240 SW1.1 ; J2.3 2492.69,155 2639.29,301.61 U1.45
  L2 w10: v1(2271,253) 2352,253 J2.3
"CON2_ USB_N": D7.2 J4.A7 J4.B7 | length 182.8
  L1 w10: J4.A7 234.84,291.16 213.16,312.84 J4.B7 289,334.53 294.47,340 D7.2
CON2_USB_N: R23.2
CON2_USB_P: D8.2 J4.A6 J4.B6 R24.2 | length 2717.9
  L1 w10: J4.B6 234.84,271 258.92,295.08 ; J4.A6 234.84,319.16 239.16,314.84 258.92,295.08 ; 258.92,295.08 263,299.16 263,291 258.92,295.08
  L1 w15: J4.A6 239.16,314.84 287,314.84 296.84,305 D8.2 381,305 455,231 1223,231 1237,245 1237,763 1296,822 1296,920 1358,982 1680,982 1728,934 1728,876 1795,809 1795,659 1831,623 R24.2
"CON ESP USB N": J2.21
"CON ESP USB P": J2.20
CON_ESP_USB_N: R25.2
CON_ESP_USB_P: R26.2
CON_GPIO0: R21.1
CON_GPIOO: x.3
"DTR  FTDI": U2.18
"DTR FTDI": Q2.3 R16.2 | length 307.8
  L1 w10: R16.2 1136.61,724.02 1105,755.62 1105,797 1208,900 Q2.3
"ESP USB N": R23.1 R25.1 U1.23 | length 260.1
  L1 w10: R23.1 1949,590.98 1948.02,590 R25.1 2022,558 2053.96,589.96 U1.23
"ESP USB P": R24.1 R26.1 U1.24 | length 294.3
  L1 w10: R24.1 1913.02,590.99 1914.01,590 R26.1 1929.63,558 1946.63,541 2096.7,541 2112.2,556.5 U1.24
FTDI_USB_N: R6.2 U2.9 | length 82.2
  L1 w10: R6.2 577.01,796.68 612,761.69 v1(612,752.33)
FTDI_USB_P: R7.2 U2.8
GND: 4u7,16v.1 C1.1 C2.1 C3.1 C4.1 C5.1 C6.1 C7.1 C8.1 C9.1 C10.1 C11.1 C12.1 C13.1 C14.1 C15.1 C16.1 D1.1 D3.1 D4.1 D5.1 D6.1 D7.1 D8.1 J2.2 J2.24 J3.A1B12 J3.B1A12 J3.S1 J3.S2 J3.S3 J3.S4 J4.A1B12 J4.A5 J4.B1A12 J4.S1 J4.S2 J4.S3 J4.S4 R10.1 R11.1 R12.1 R13.1 R14.1 R14.2 R15.1 R15.2 SW1.3 SW1.4 SW2.3 SW2.4 U1.1 U1.2 U1.42 U1.43 U1.46 U1.47 U1.48 U1.49 U1.50 U1.51 U1.52 U1.53 U1.54 U1.55 U1.56 U1.57 U1.58 U1.59 U1.60 U1.61 U1.62 U1.63 U1.64 U1.65 U1.66 U1.67 U1.68 U1.69 U1.71 U1.72 U1.73 U2.3 U2.13 U2.21 U3.2 U3.4 x.1 x.23 | length 14758.5
  L1 w10: J4.S4 123.92,134.92 149,160 149,462.08 162,475.08 J4.S1 222,475.08 J4.A1B12@222,430.98 ; J4.S3 J3.S4 ; v1(195,179) 210,179.02 ; J4.S2 195.2,134.92 195.2,164.22 210,179.02 ; J3.S2 195.2,714.92 195.2,744.22 210,759.02 J3.B1A12 320,759.02 349.41,729.61 ; J3.S1 195.2,1055.08 195.2,1025.78 210,1010.98 J3.A1B12 ; J4.B1A12 210,179.02 ; J4.A5 200,354.21 178,376.21 178,408.98 200,430.98 J4.A1B12@222,430.98 ; J2.24 D8.1 ; D7.1 334.41,381.18 D6.1 ; D5.1 343,905 343,785 D4.1 ; x.23 455,976 464,967 464,896 445,877 R12.1 R11.1 ; C9.1 460,259 477,276 477,301.07 ; C2.1 473.86,560 408.86,495 400,495 345,550 345,649.59 349.41,654 D3.1 349.41,729.61 ; v1(486,930) v1(498,930) C8.1 543.07,913 580.33,913 692,1024.67 718,1024.67 749.59,993.09 U2.13 U2.21 U2.3 ; C11.1 590,386 591,385 U3.2 854,385 ; C1.1 801.93,645 ; U3.4 854,385 ; C7.1 1030,695 1000,665 R10.1 R13.1 972.01,598 860,598 813,645 801.93,645 ; SW1.4 SW1.3 ; SW2.4 SW2.3 1558.91,816 1360,816 1318,774 1318,727 1360,685 1673.72,685 ; C16.1 1742.26,753.07 ; C15.1 1797.07,278.07 ; v1(2055,840) 2080.55,865.55 U1.63 ; U1.64 v1(2097,314.37) 2065.38,314.37 1997,245.99 1914.61,245.99 1883,277.6 D1.1 1819.47,277.6 1819,278.07 1797.07,278.07 ; v1(2290,650) 2293.79,650 2298.71,654.92 U1.71 U1.72 ; U1.73 U1.72 ; U1.69 U1.66 U1.67 ; C13.1 2468.07,956.14 2480,968.07 2570,968.07 2581.93,956.14 C14.1 2583.83,933.82 2593.95,900.85 2598.64,896.16 2650.02,896.16 2652.95,893.24 U1.62 2680.63,897 2670,907.63 C3.1 2670,975 2655,990 x.1 ; U1.68 U1.67 ; U1.42 U1.43 2572.36,340 2588.07,355.71 U1.46 ; J2.2 2613.07,218.07 C4.1 2621,235 2621,254.74 U1.65 U1.46 ; U1.2 2605.83,838.39 2620,824.21 2660,824.21 ; U1.1 2639.29,844.92 2660,824.21 ; J4.A1B12@222,430.98 J4.A1B12 282,430.98 286.02,435 D6.1 ; D6.1 339,435 356,418 392,418 409,435 R15.2 R15.1 477.01,413.01 460,396 R14.2 R14.1 460,318.07 477,301.07 ; 349.41,729.61 349.41,737 360,747.59 D4.1 ; D4.1 390,785 415,810 R11.1 ; R11.1 476,810 526,760 C5.1 543.07,703.93 600,647 695,647 C6.1 729.14,661.14 732,664 775,664 794,645 801.93,645 ; 477,301.07 480,298.07 C12.1 C10.1 590,273 600,263 732,263 854,385 ; SW1.3 1661.5,672.77 1673.72,685 ; SW1.3 1661.5,418 1760,418 1809,369 1809,290 1797.07,278.07 ; 1673.72,685 1741.79,753.07 1742.26,753.07 ; 1673.72,685 1674.19,685 1742.26,753.07 ; U1.72 U1.61 U1.67 ; U1.67 U1.53 ; 2660,824.21 U1.60 U1.59 U1.58 U1.57 U1.56 U1.55 U1.54 U1.53 ; U1.46 U1.47 U1.48 U1.49 U1.50 U1.51 U1.52 U1.53
  L1 w15: U1.1 U1.62
  L2 w10: J4.S4 J4.S2 ; J4.S3 J4.S1 ; J3.S4 J3.S2 ; J3.S3 J3.S1 254.92,1055.08 322,988 403,988 x.23 486,1009 v1(486,930) ; v1(195,179) 219,155 J2.24 ; v1(498,930) 1185,243 2143,243 2178,278 2427,278 ; v1(2055,840) 2245,650 v1(2290,650) ; v1(2097,314.37) 2104.37,307 2398,307 2427,278 ; J2.2 2427,278
GPIO0: R21.2 R22.2 U1.4 | length 705.8
  L1 w10: R22.2 R21.2 1940,929 2503.9,929 2538.9,894 U1.4
GPIO1: U1.5 x.4 | length 327.9
  L1 w10: v1(2505,820) 2505.43,820.43 U1.5
  L4 w10: x.4 2505,890 v1(2505,820)
GPIO2: D2.1 U1.6 x.5 | length 1422.1
  L1 w10: 1745.78,860 1764.48,878.7 D2.1 ; U1.6 2471.97,750.04 v1(2480,742.01)
  L2 w10: x.5 2255,967.01 v1(2480,742.01)
  L4 w10: 1745.78,860 1971.57,860 2136.57,695 2432.99,695 v1(2480,742.01)
GPIO3: U1.7 x.6 | length 376.8
  L1 w10: U1.7 v1(2438.5,901.5)
  L4 w10: x.6 2205,990 2350,990 v1(2438.5,901.5)
GPIO4: U1.8 x.7 | length 670.6
  L1 w10: v1(2405,750) v1(2405,750) U1.8
  L4 w10: x.7 2105,990 2170,990 2190,970 2330,970 2405,895 v1(2405,750)
GPIO5: U1.9 x.8 | length 508.1
  L1 w10: U1.9 v1(2371.57,898.43)
  L4 w10: x.8 2020,975 2155,975 2180.43,949.57 2320.43,949.57 v1(2371.57,898.43)
GPIO6: U1.10 x.9 | length 720.6
  L1 w10: v1(1855,909) x.9 ; v1(2338.11,803) U1.10
  L2 w10: v1(1855,909) 2232.11,909 v1(2338.11,803)
GPIO7: U1.11 x.10 | length 650.9
  L1 w10: U1.11 v1(2304.65,915)
  L4 w10: x.10 1820,975 2000,975 2035,940 2120,940 2145,915 v1(2304.65,915)
GPIO8: U1.12 x.11 | length 708.6
  L1 w10: U1.12 v1(2271.18,900)
  L4 w10: x.11 1735,960 1985,960 2025,920 2110,920 2130,900 v1(2271.18,900)
GPIO9: U1.13 x.12 | length 812.5
  L1 w10: v1(2234.26,823.46) 2237.72,826.91 U1.13
  L4 w10: x.12 1605,990 1655,990 1705,940 1975,940 2010,905 2085,905 2105,885 2172.72,885 v1(2234.26,823.46)
GPIO10: U1.14 x.13 | length 868.3
  L1 w10: v1(2204.25,832.43) U1.14
  L4 w10: x.13 1525,970 1650,970 1730,890 2075,890 2095,870 2166.69,870 v1(2204.25,832.43)
GPIO11: U1.15 x.14 | length 952.2
  L1 w10: v1(2170.35,820) 2170.79,820.43 U1.15
  L4 w10: x.14 1410,985 1475,985 1510,950 1635,950 1710,875 1979.4,875 2034.4,820 v1(2170.35,820)
GPIO12: U1.16 x.15 | length 971.5
  L1 w10: v1(1975,815) 2095,815 2104.21,824.21 U1.16
  L4 w10: x.15 1325,970 1460,970 1515,915 1570,915 1670,815 v1(1975,815)
GPIO13: U1.17 x.16 | length 1094.9
  L1 w10: v1(1985,770) 2005.75,790.75 U1.17
  L2 w10: x.16 1192,1003 1279,1003 1512,770 v1(1985,770)
GPIO14: U1.18 x.17 | length 1194.8
  L1 w10: v1(1956.11,753.89) 1960,750 1990,750 U1.18
  L4 w10: x.17 1165,930 1360,930 1536.11,753.89 v1(1956.11,753.89)
GPIO15: U1.19 x.18 | length 1305.4
  L1 w10: v1(1842,723.82) U1.19
  L4 w10: x.18 1090,905 1355,905 1536.18,723.82 v1(1842,723.82)
GPIO16: U1.20 x.19 | length 1427
  L1 w10: v1(1985,675) 2000.35,690.35 U1.20
  L4 w10: x.19 925.57,969.43 1043.87,870 1370,870 1565,675 v1(1985,675)
GPIO17: U1.21 x.20 | length 1533.1
  L1 w10: v1(1833.61,656.89) U1.21
  L4 w10: x.20 955,840 1360,840 1543.11,656.89 v1(1833.61,656.89)
GPIO18: U1.22 x.21 | length 1648
  L1 w10: v1(2097,623.43) U1.22
  L2 w10: x.21 693.22,1001.78 693.22,1000 705.55,987.67 1252.33,987.67 1616.57,623.43 v1(2097,623.43)
GPIO21: J2.19 U1.25 | length 1431.9
  L1 w10: v1(1833.74,463.74) 1893.03,523.03 U1.25
  L4 w10: J2.19 900,205 965,205 1065,305 1320,305 1350,335 1570,335 1645,410 1705,410 1758.74,463.74 v1(1833.74,463.74)
GPIO26: J2.18 U1.26 | length 1318
  L1 w10: v1(1895,475) 1909.57,489.57 U1.26
  L4 w10: J2.18 1000,205 1050,205 1120,275 1320,275 1360,315 1599.14,315 1659.14,375 1720,375 1755,410 1830,410 v1(1895,475)
GPIO33: J2.17 U1.28 | length 1190.3
  L1 w10: v1(1875,390) 1907.64,422.64 U1.28
  L4 w10: J2.17 1145,250 1330,250 1370,290 1605,290 1662.93,347.93 1722.93,347.93 1765,390 v1(1875,390)
GPIO34: J2.16 U1.29 | length 1076.4
  L1 w10: v1(1914.17,389.17) U1.29
  L4 w10: J2.16 1225,230 1355,230 1405,280 1625,280 1675,330 1740,330 1765,355 1880,355 v1(1914.17,389.17)
GPIO35: J2.15 U1.31 | length 1115
  L1 w10: U1.31 v1(2170.79,405)
  L4 w10: J2.15 1305,210 1365,210 1415,260 1640,260 1690,310 1750,310 1775,335 1910,335 1925,350 2020,350 2075,405 v1(2170.79,405)
GPIO36: J2.14 U1.32 | length 993
  L1 w10: v1(2194.17,370) 2204.25,359.92 U1.32
  L4 w10: J2.14 1425,230 1640,230 1700,290 1895,290 1935,330 2025,330 2065,370 v1(2194.17,370)
GPIO37: J2.13 U1.33 | length 904.1
  L1 w10: U1.33 v1(2237.72,350)
  L4 w10: J2.13 1515,220 1650,220 1700,270 1910.86,270 1955.86,315 2035,315 2070,350 v1(2237.72,350)
GPIO38: J2.12 U1.34 | length 851.6
  L1 w10: U1.34 2271.18,359.06 v1(2271.61,359.49)
  L4 w10: J2.12 1600,205 1660,205 1680.86,225.86 1785.86,225.86 1805.99,245.99 1975.99,245.99 2025,295 2140,295 2165,320 2232.13,320 v1(2271.61,359.49)
GPIO39: J2.11 U1.35 | length 940
  L1 w10: U1.35 2304.65,428.44 v1(2304.69,428.48)
  L4 w10: J2.11 1700,205 1790,205 1815,230 2005.19,230 2055.19,280 2150,280 2175,305 2280,305 2304.69,329.69 v1(2304.69,428.48)
GPIO40: J2.10 U1.36 | length 728.1
  L1 w10: U1.36 2338.11,359.49 v1(2338.54,359.49)
  L4 w10: J2.10 1760.42,155 1815.42,210 2000,210 2030,240 2065,240 2090,265 2155,265 2175,285 2280,285 2338.54,343.54 v1(2338.54,359.49)
GPIO41: J2.9 U1.37 | length 799.2
  L1 w10: U1.37 v1(2371.61,429.6) v1(2371.61,429.6)
  L4 w10: J2.9 1890,195 2005,195 2030,220 2070,220 2095,245 2170,245 2190,265 2290,265 2371.61,346.61 v1(2371.61,429.6)
GPIO42: J2.8 U1.38 | length 585.1
  L1 w10: v1(2404.76,359.76) 2405.04,359.49 U1.38
  L4 w10: J2.8 1995,155 2040,200 2080,200 2110,230 2275,230 v1(2404.76,359.76)
GPIO45: J2.5 U1.41 | length 577.7
  L1 w10: U1.41 v1@2505.43,429.58 ; v1@2505.43,429.58 v1(2505.47,429.62)
  L4 w10: J2.5 2285,155 2330,200 2435,200 2505.47,270.47 v1(2505.47,429.62)
GPIO46: J2.4 U1.44 | length 337.9
  L1 w10: J2.4 2482,287 2605.83,287 U1.44
GPIO47: J2.23 U1.27 | length 1891.5
  L1 w10: v1(1710,545) 1815.45,439.55 1859.55,439.55 1876.1,456.1 U1.27
  L4 w10: J2.23 545,250 940,250 1075,385 1550,385 v1(1710,545)
GPIO48: J2.22 U1.30 | length 1757.3
  L1 w10: v1(1745,470) 1859.29,355.71 U1.30
  L4 w10: J2.22 620,225 955,225 1055,325 1320,325 1350,355 1555.86,355 1670.86,470 v1(1745,470)
NetC6_2: C6.2 R8.1 U2.11 | length 378.5
  L1 w10: R8.1 653,662.99 685.01,695 C6.2 695,720 741,766 760,766 800,806 800,922 788.96,933.04 U2.11
NetD1_2: D1.2 R4.1 | length 85.5
  L1 w10: D1.2 1883,315 1906,292 1920,292 R4.1
NetD2_2: D2.2 R3.1 | length 66.9
  L1 w10: D2.2 1821.53,841.3 1862.24,882.01 R3.1
NetJ3_A5: J3.A5 R12.2 | length 222.7
  L1 w10: J3.A5 393.25,934.21 423.45,904.02 R12.2
NetJ3_B5: J3.B5 R11.2 | length 371.3
  L1 w10: J3.B5 v1(305,816.1) ; R11.2 489.02,775.98 v1(509,756)
  L2 w10: v1(305,816.1) 365.1,756 v1(509,756)
NetQ1_1: Q1.1 R16.1 | length 206.5
  L1 w10: v1(1075,718) 1103,690 R16.1 ; v1(1122.5,765.5) 1123,765 Q1.1
  L4 w10: v1(1075,718) v1(1122.5,765.5)
NetQ2_1: Q2.1 R18.1 | length 96
  L1 w10: R18.1 1140,905 1172.4,937.4 Q2.1
NetR10_2: R10.2 U2.15 | length 514
  L1 w10: v1(710,1005) 710.22,1004.78 U2.15 ; R10.2 956,665 v1(956,759)
  L4 w10: v1(710,1005) v1(956,759)
"RTS FTDI": Q1.2 R18.2 U2.19 | length 1100.3
  L1 w10: v1(607,813) 607,840 637,870 641,870 655.06,855.94 U2.19 ; R18.2 1095,939.02 1095,751.48 1156.28,690.2 1167,690.2 ; v1(1119.8,643) 1167,690.2 ; Q1.2 1167,690.2
  L4 w10: v1(607,813) 803.8,813 896.8,720 1042.8,720 v1(1119.8,643)
"RXD  FTDI": U2.1
"RXD FTDI": R19.1
"TXD  FTDI": R20.1 U2.17 | length 1742.3
  L1 w10: v1(641,890) 646.31,895.31 U2.17 ; R20.1 v1(2062.01,276.99)
  L2 w10: v1(641,890) 1060,890 1673.01,276.99 v1(2062.01,276.99)
U0RXD: J2.6 R20.2 U1.40 | length 958.8
  L1 w10: R20.2 2046,245 2066,225 2189,225 2245,281 2247,281 2260,268 2260,212 2240,192 2187,192 J2.6 ; U1.40 2471.97,356.02 v1(2472.4,356.45)
  L4 w10: J2.6 2195,200 2295,200 2311.11,216.11 2421.11,216.11 2472.4,267.4 v1(2472.4,356.45)
U0TXD: J2.7 R19.2 U1.39 | length 820.6
  L1 w10: R19.2 2127,245 2175,293 2438.5,293 ; v1(2438.5,258.5) 2438.5,293 ; U1.39 2438.5,293
  L4 w10: J2.7 2105,210 2285,210 2333.5,258.5 v1(2438.5,258.5)
VBUS_SENSE: R9.1 R13.2 U2.16 | length 636.9
  L1 w10: v1(625,915) U2.16 ; v1(719,724) 937.99,724 R9.1 937.99,698.99 920,681 920,648.99 937.99,631 R13.2
  L2 w10: v1(625,915) 607,897 607,836 v1(719,724)
pads on no net: J3.A8 J3.B8 J4.A8 J4.B5 J4.B8 U1.70 U2.2 U2.4 U2.5 U2.6 U2.7 U2.14 x.24
copper on no net: | length 983.1
  L1 w20: v1@2405.04,470 2405.04,525
  L4 w10: 1155,1040 1205,990 1255,990 1265,990 1300,955 1450,955 1505,900 1550,900 1680,770 1950,770 1965,785
  other v1: 2404.96,469.92

## Polygon pours and split planes (outlines as drawn)
no net on L3 (split plane): 2684.9,120.1 20.1,120.1 20.1,1079.9 2684.9,1079.9

## Text inside footprints (layer, text, board x,y; h text height)
J2: Bottom Overlay "1" at 2627,71 h40 r270
J5: Top Overlay "1" at 296,601 h40
J6: Top Overlay "1" at 1539,501 h40 r90
x: Bottom Overlay "1" at 2632,956 h40 r270